# Altium PCB ART_CARD Rev 5.PcbDoc (part 12 of 13)
Units mil, origin at the board's own origin, x right, y up, seen from the top; angles counter-clockwise.
Board outline 6600.39 x 3903.54 mil, 8 copper layers (Top, Inner Layer 2, Inner Layer 3, Inner Layer 4, Inner Layer 5, Inner Layer 6, Inner Layer 7, Bottom), stack 63.111 mil thick; 542 components, 382 nets, 2410 pads, 1433 vias.
Unrouted connection lines stored in the file: 1247.
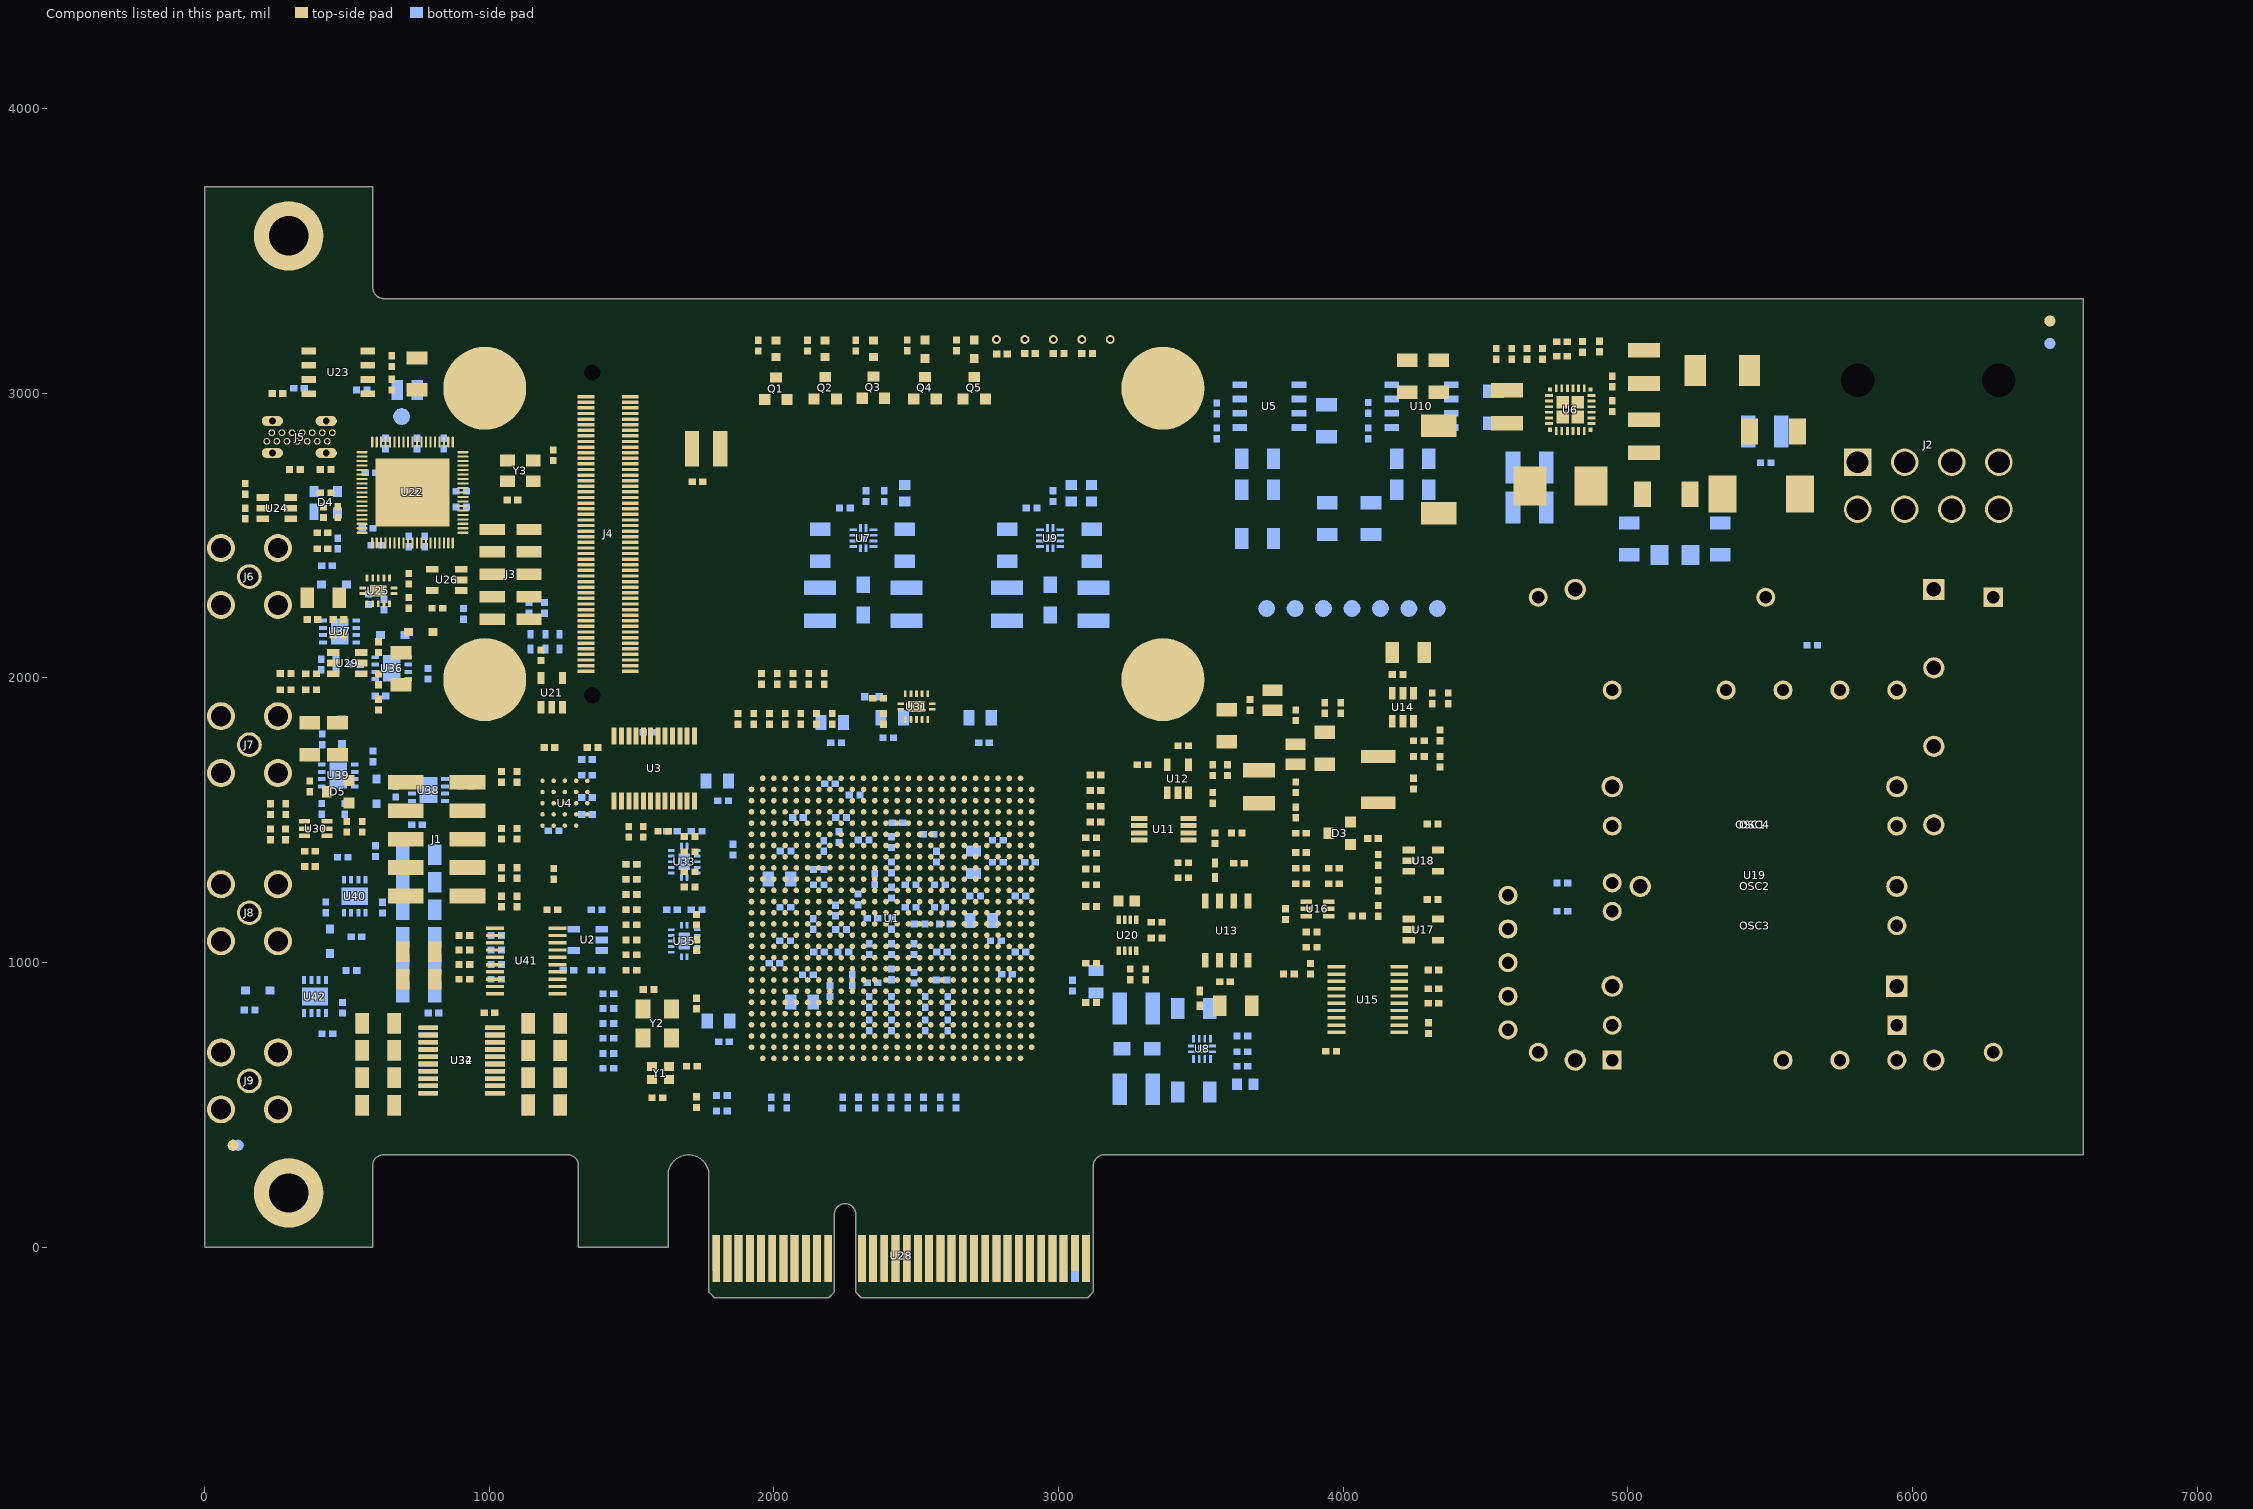
[diagram p18: the components of this part, seen from the top]

## Other copper (continued)
Inner Layer 2 (plane layer: these items are gaps in the copper):
  circle w12.2: c-275.59,-275.59 r98.43
  circle w12.2: c-275.59,-275.59 r98.43
  circle w12.2: c-275.59,-275.59 r98.43
  circle w12.2: c-275.59,-275.59 r98.43
  circle w12.2: c-275.59,-275.59 r98.43
  circle w12.2: c-275.59,-275.59 r98.43
  circle w12.2: c-275.59,-275.59 r98.43
  circle w12.2: c-275.59,-275.59 r98.43
  circle w12.2: c-275.59,-275.59 r98.43
  circle w12.2: c-275.59,-275.59 r98.43
  circle w12.2: c6889.76,3622.05 r98.43
  circle w12.2: c6889.76,3622.05 r98.43
  circle w12.2: c6889.76,3622.05 r98.43
  circle w12.2: c6889.76,3622.05 r98.43
  circle w12.2: c6889.76,3622.05 r98.43
  circle w12.2: c6889.76,3622.05 r98.43
  circle w12.2: c6889.76,3622.05 r98.43
  circle w12.2: c6889.76,3622.05 r98.43
  circle w12.2: c6889.76,3622.05 r98.43
  circle w12.2: c6889.76,3622.05 r98.43
  circle w12.2: c-275.59,4015.75 r98.43
  circle w12.2: c-275.59,4015.75 r98.43
  circle w12.2: c-275.59,4015.75 r98.43
  circle w12.2: c-275.59,4015.75 r98.43
  circle w12.2: c-275.59,4015.75 r98.43
  circle w12.2: c-275.59,4015.75 r98.43
  circle w12.2: c-275.59,4015.75 r98.43
  circle w12.2: c-275.59,4015.75 r98.43
  circle w12.2: c-275.59,4015.75 r98.43
  circle w12.2: c-275.59,4015.75 r98.43
  region: 89 vertices and 1 holes, not listed, extent 0,-177.17 6600.39,3726.38
  lines w5.91: 1781.59,254.06 cw(c1771.65,253.94) 1781.59,253.94 1781.59,-153.36 1795.45,-167.23 2188.8,-167.23 2202.66,-153.36 2202.66,116.14 cw(c2250,116.14) 2297.34,116.14 2297.34,-153.36 2311.2,-167.23 3098.25,-167.23 3112.11,-153.36 3112.11,285.43 cw(c3161.42,285.43) 3161.42,334.74 6590.46,334.74 6590.46,3322.74 629.92,3322.74 cw(c629.92,3372.05) 580.61,3372.05 580.61,3716.44 9.94,3716.44 9.94,9.94 580.61,9.94 580.61,287.4 cw(c627.95,287.4) 627.95,334.74 1275.59,334.74 cw(c1275.59,287.4) 1322.93,287.4 1322.93,9.94 1618.02,9.94 1618.02,253.94 cw(c1627.95,253.94) 1618.02,254.07 cw(c1699.8,252.95) 1781.59,254.09
  lines w10: 4173.23,-590.55 6082.68,-590.55 ; 5551.18,-708.66 5551.18,-472.44 ; 4173.23,-708.66 6082.68,-708.66 6082.68,-472.44 4173.23,-472.44 4173.23,-708.66
  lines w12.2: -370.08,-267.72 -370.08,-263.78 ; -370.08,4023.62 -370.08,4027.56 ; -366.14,-248.03 -279.53,-248.03 ; -366.14,4043.31 -279.53,4043.31 ; -358.27,-232.28 -275.59,-232.28 ; -358.27,4059.06 -275.59,4059.06 ; -354.33,-220.47 -275.59,-220.47 ; -354.33,4070.87 -275.59,4070.87 ; -346.46,-212.6 -279.53,-212.6 -350.39,-212.6 -275.59,-212.6 ; -346.46,4078.74 -279.53,4078.74 -350.39,4078.74 -275.59,4078.74 ; -338.58,-200.79 -279.53,-200.79 -334.65,-200.79 ; -338.58,4090.55 -279.53,4090.55 -334.65,4090.55 ; -334.65,-196.85 -275.59,-196.85 ; -334.65,4094.49 -275.59,4094.49 ; -326.77,-196.85 -275.59,-196.85 ; -326.77,4094.49 -275.59,4094.49 ; -322.83,-196.85 -330.71,-196.85 -275.59,-196.85 ; -322.83,4094.49 -330.71,4094.49 -275.59,4094.49 ; -311.02,-185.04 -275.59,-185.04 -299.21,-185.04 -279.53,-185.04 ; -311.02,4106.3 -275.59,4106.3 -299.21,4106.3 -279.53,4106.3 ; -307.09,-185.04 -279.53,-185.04 ; -307.09,4106.3 -279.53,4106.3 ; -303.15,-185.04 -279.53,-185.04 ; -303.15,4106.3 -279.53,4106.3 ; -279.53,-255.91 -370.08,-255.91 ; -279.53,-244.09 -366.14,-244.09 -275.59,-244.09 ; -279.53,-236.22 -362.2,-236.22 -275.59,-236.22 ; -279.53,-224.41 -354.33,-224.41 -275.59,-224.41 ; -279.53,4035.43 -370.08,4035.43 ; -279.53,4047.24 -366.14,4047.24 -275.59,4047.24 ; -279.53,4055.12 -362.2,4055.12 -275.59,4055.12 ; -279.53,4066.93 -354.33,4066.93 -275.59,4066.93 ; -275.59,-338.58 -200.79,-338.58 ; -275.59,-326.77 -196.85,-326.77 ; -275.59,-318.9 -188.98,-318.9 ; -275.59,-307.09 -185.04,-307.09 ; -275.59,3952.76 -200.79,3952.76 ; -275.59,3964.57 -196.85,3964.57 ; -275.59,3972.44 -188.98,3972.44 ; -275.59,3984.25 -185.04,3984.25 ; -271.65,-358.27 -224.41,-358.27 ; -271.65,-346.46 -208.66,-346.46 ; -271.65,-342.52 -208.66,-342.52 ; -271.65,-334.65 -200.79,-334.65 ; -271.65,-287.4 -181.1,-287.4 ; -271.65,-283.46 -181.1,-283.46 ; -271.65,3933.07 -224.41,3933.07 ; -271.65,3944.88 -208.66,3944.88 ; -271.65,3948.82 -208.66,3948.82 ; -271.65,3956.69 -200.79,3956.69 ; -271.65,4003.94 -181.1,4003.94 ; -271.65,4007.87 -181.1,4007.87 ; -248.03,-366.14 -271.65,-366.14 ; -248.03,3925.2 -271.65,3925.2 ; -244.09,-366.14 -275.59,-366.14 ; -244.09,3925.2 -275.59,3925.2 ; -240.16,-362.2 -275.59,-362.2 ; -240.16,3929.13 -275.59,3929.13 ; -236.22,-362.2 -275.59,-362.2 ; -236.22,3929.13 -275.59,3929.13 ; -224.41,-354.33 -275.59,-354.33 -220.47,-354.33 -271.65,-354.33 -216.54,-354.33 ; -224.41,3937.01 -275.59,3937.01 -220.47,3937.01 -271.65,3937.01 -216.54,3937.01 ; -216.54,-350.39 -275.59,-350.39 -212.6,-350.39 ; -216.54,3940.94 -275.59,3940.94 -212.6,3940.94 ; -212.6,-346.46 -275.59,-346.46 ; -212.6,3944.88 -275.59,3944.88 ; -204.72,-342.52 -275.59,-342.52 ; -204.72,3948.82 -275.59,3948.82 ; -200.79,-330.71 -271.65,-330.71 -196.85,-330.71 ; -200.79,3960.63 -271.65,3960.63 -196.85,3960.63 ; -188.98,-307.09 -271.65,-307.09 ; -188.98,3984.25 -271.65,3984.25 ; -185.04,-287.4 -275.59,-287.4 ; -185.04,-283.46 -275.59,-283.46 ; -185.04,4003.94 -275.59,4003.94 ; -185.04,4007.87 -275.59,4007.87 ; 6795.28,3629.92 6795.28,3633.86 ; 6799.21,3649.61 6885.83,3649.61 ; 6807.09,3665.35 6889.76,3665.35 ; 6811.02,3677.17 6889.76,3677.17 ; 6818.9,3685.04 6885.83,3685.04 6814.96,3685.04 6889.76,3685.04 ; 6826.77,3696.85 6885.83,3696.85 6830.71,3696.85 ; 6830.71,3700.79 6889.76,3700.79 ; 6838.58,3700.79 6889.76,3700.79 ; 6842.52,3700.79 6834.65,3700.79 6889.76,3700.79 ; 6854.33,3712.6 6889.76,3712.6 6866.14,3712.6 6885.83,3712.6 ; 6858.27,3712.6 6885.83,3712.6 ; 6862.2,3712.6 6885.83,3712.6 ; 6885.83,3641.73 6795.28,3641.73 ; 6885.83,3653.54 6799.21,3653.54 6889.76,3653.54 ; 6885.83,3661.42 6803.15,3661.42 6889.76,3661.42 ; 6885.83,3673.23 6811.02,3673.23 6889.76,3673.23 ; 6889.76,3559.06 6964.57,3559.06 ; 6889.76,3570.87 6968.5,3570.87 ; 6889.76,3578.74 6976.38,3578.74 ; 6889.76,3590.55 6980.32,3590.55 ; 6893.7,3539.37 6940.94,3539.37 ; 6893.7,3551.18 6956.69,3551.18 ; 6893.7,3555.12 6956.69,3555.12 ; 6893.7,3562.99 6964.57,3562.99 ; 6893.7,3610.24 6984.25,3610.24 ; 6893.7,3614.17 6984.25,3614.17 ; 6917.32,3531.5 6893.7,3531.5 ; 6921.26,3531.5 6889.76,3531.5 ; 6925.2,3535.43 6889.76,3535.43 ; 6929.13,3535.43 6889.76,3535.43 ; 6940.94,3543.31 6889.76,3543.31 6944.88,3543.31 6893.7,3543.31 6948.82,3543.31 ; 6948.82,3547.24 6889.76,3547.24 6952.76,3547.24 ; 6952.76,3551.18 6889.76,3551.18 ; 6960.63,3555.12 6889.76,3555.12 ; 6964.57,3566.93 6893.7,3566.93 6968.5,3566.93 ; 6976.38,3590.55 6893.7,3590.55 ; 6980.32,3610.24 6889.76,3610.24 ; 6980.32,3614.17 6889.76,3614.17 ; -425.2,-275.59 -125.98,-275.59 ; -425.2,-275.59 -125.98,-275.59 ; -425.2,-275.59 -125.98,-275.59 ; -425.2,-275.59 -125.98,-275.59 ; -425.2,-275.59 -125.98,-275.59 ; -425.2,-275.59 -125.98,-275.59 ; -425.2,-275.59 -125.98,-275.59 ; -425.2,-275.59 -125.98,-275.59 ; -425.2,-275.59 -125.98,-275.59 ; -425.2,-275.59 -125.98,-275.59 ; -425.2,4015.75 -125.98,4015.75 ; -425.2,4015.75 -125.98,4015.75 ; -425.2,4015.75 -125.98,4015.75 ; -425.2,4015.75 -125.98,4015.75 ; -425.2,4015.75 -125.98,4015.75 ; -425.2,4015.75 -125.98,4015.75 ; -425.2,4015.75 -125.98,4015.75 ; -425.2,4015.75 -125.98,4015.75 ; -425.2,4015.75 -125.98,4015.75 ; -425.2,4015.75 -125.98,4015.75 ; -370.08,-263.78 -275.59,-263.78 ; -370.08,-263.78 -279.53,-263.78 -370.08,-263.78 ; -370.08,-263.78 -275.59,-263.78 ; -370.08,-263.78 -275.59,-263.78 ; -370.08,-263.78 -275.59,-263.78 ; -370.08,-263.78 -275.59,-263.78 ; -370.08,-263.78 -275.59,-263.78 ; -370.08,-263.78 -275.59,-263.78 ; -370.08,-263.78 -275.59,-263.78 ; -370.08,-255.91 -275.59,-255.91 -370.08,-255.91 ; -370.08,-251.97 -279.53,-251.97 ; -370.08,-251.97 -279.53,-251.97 ; -370.08,-251.97 -279.53,-251.97 ; -370.08,-251.97 -275.59,-251.97 -370.08,-251.97 ; -370.08,4027.56 -275.59,4027.56 ; -370.08,4027.56 -279.53,4027.56 -370.08,4027.56 ; -370.08,4027.56 -275.59,4027.56 ; -370.08,4027.56 -275.59,4027.56 ; -370.08,4027.56 -275.59,4027.56 ; -370.08,4027.56 -275.59,4027.56 ; -370.08,4027.56 -275.59,4027.56 ; -370.08,4027.56 -275.59,4027.56 ; -370.08,4027.56 -275.59,4027.56 ; -370.08,4035.43 -275.59,4035.43 -370.08,4035.43 ; -370.08,4039.37 -279.53,4039.37 ; -370.08,4039.37 -279.53,4039.37 ; -370.08,4039.37 -279.53,4039.37 ; -370.08,4039.37 -275.59,4039.37 -370.08,4039.37 ; -366.14,-240.16 -279.53,-240.16 ; -366.14,-240.16 -279.53,-240.16 ; -366.14,-240.16 -275.59,-240.16 ; -366.14,-240.16 -275.59,-240.16 ; -366.14,4051.18 -279.53,4051.18 ; -366.14,4051.18 -279.53,4051.18 ; -366.14,4051.18 -275.59,4051.18 ; -366.14,4051.18 -275.59,4051.18 ; -362.2,-240.16 -279.53,-240.16 ; -362.2,-240.16 -279.53,-240.16 ; -362.2,-240.16 -275.59,-240.16 ; -362.2,4051.18 -279.53,4051.18 ; -362.2,4051.18 -279.53,4051.18 ; -362.2,4051.18 -275.59,4051.18 ; -358.27,-228.35 -279.53,-228.35 ; -358.27,-228.35 -279.53,-228.35 ; -358.27,-228.35 -279.53,-228.35 ; -358.27,-228.35 -279.53,-228.35 ; -358.27,-228.35 -275.59,-228.35 -358.27,-228.35 ; -358.27,-228.35 -279.53,-228.35 ; -358.27,4062.99 -279.53,4062.99 ; -358.27,4062.99 -279.53,4062.99 ; -358.27,4062.99 -279.53,4062.99 ; -358.27,4062.99 -279.53,4062.99 ; -358.27,4062.99 -275.59,4062.99 -358.27,4062.99 ; -358.27,4062.99 -279.53,4062.99 ; -350.39,-216.54 -279.53,-216.54 ; -350.39,-216.54 -279.53,-216.54 ; -350.39,-216.54 -279.53,-216.54 ; -350.39,-216.54 -275.59,-216.54 -354.33,-216.54 -279.53,-216.54 ; -350.39,-216.54 -279.53,-216.54 ; -350.39,4074.8 -279.53,4074.8 ; -350.39,4074.8 -279.53,4074.8 ; -350.39,4074.8 -279.53,4074.8 ; -350.39,4074.8 -275.59,4074.8 -354.33,4074.8 -279.53,4074.8 ; -350.39,4074.8 -279.53,4074.8 ; -342.52,-204.72 -279.53,-204.72 ; -342.52,-204.72 -279.53,-204.72 ; -342.52,-204.72 -279.53,-204.72 ; -342.52,-204.72 -275.59,-204.72 ; -342.52,-204.72 -279.53,-204.72 ; -342.52,-204.72 -275.59,-204.72 ; -342.52,4086.61 -279.53,4086.61 ; -342.52,4086.61 -279.53,4086.61 ; -342.52,4086.61 -279.53,4086.61 ; -342.52,4086.61 -275.59,4086.61 ; -342.52,4086.61 -279.53,4086.61 ; -342.52,4086.61 -275.59,4086.61 ; -322.83,-192.91 -279.53,-192.91 ; -322.83,-192.91 -279.53,-192.91 ; -322.83,-192.91 -279.53,-192.91 ; -322.83,4098.43 -279.53,4098.43 ; -322.83,4098.43 -279.53,4098.43 ; -322.83,4098.43 -279.53,4098.43 ; -318.9,-188.98 -279.53,-188.98 ; -318.9,-188.98 -279.53,-188.98 ; -318.9,-188.98 -275.59,-188.98 -311.02,-188.98 -279.53,-188.98 ; -318.9,4102.36 -279.53,4102.36 ; -318.9,4102.36 -279.53,4102.36 ; -318.9,4102.36 -275.59,4102.36 -311.02,4102.36 -279.53,4102.36 ; -279.53,-251.97 -366.14,-251.97 -279.53,-251.97 ; -279.53,-204.72 -338.58,-204.72 -275.59,-204.72 ; -279.53,-192.91 -326.77,-192.91 -279.53,-192.91 ; -279.53,4039.37 -366.14,4039.37 -279.53,4039.37 ; -279.53,4086.61 -338.58,4086.61 -275.59,4086.61 ; -279.53,4098.43 -326.77,4098.43 -279.53,4098.43 ; -275.59,-425.2 -275.59,-125.98 ; -275.59,-425.2 -275.59,-125.98 ; -275.59,-425.2 -275.59,-125.98 ; -275.59,-425.2 -275.59,-125.98 ; -275.59,-425.2 -275.59,-125.98 ; -275.59,-425.2 -275.59,-125.98 ; -275.59,-425.2 -275.59,-125.98 ; -275.59,-425.2 -275.59,-125.98 ; -275.59,-425.2 -275.59,-125.98 ; -275.59,-425.2 -275.59,-125.98 ; -275.59,-366.14 -240.16,-366.14 -271.65,-366.14 ; -275.59,-366.14 -251.97,-366.14 -271.65,-366.14 ; -275.59,-362.2 -232.28,-362.2 -275.59,-362.2 ; -275.59,-358.27 -224.41,-358.27 ; -275.59,-358.27 -224.41,-358.27 ; -275.59,-358.27 -224.41,-358.27 ; -275.59,-346.46 -208.66,-346.46 ; -275.59,-346.46 -208.66,-346.46 ; -275.59,-346.46 -208.66,-346.46 ; -275.59,-342.52 -208.66,-342.52 ; -275.59,-342.52 -208.66,-342.52 ; -275.59,-334.65 -200.79,-334.65 ; -275.59,-334.65 -200.79,-334.65 ; -275.59,-334.65 -200.79,-334.65 ; -275.59,-334.65 -200.79,-334.65 ; -275.59,-330.71 -196.85,-330.71 ; -275.59,-330.71 -196.85,-330.71 ; -275.59,-330.71 -196.85,-330.71 ; -275.59,-322.83 -192.91,-322.83 ; -275.59,-322.83 -192.91,-322.83 ; -275.59,-322.83 -192.91,-322.83 ; -275.59,-311.02 -185.04,-311.02 ; -275.59,-311.02 -188.98,-311.02 -271.65,-311.02 -185.04,-311.02 ; -275.59,-311.02 -185.04,-311.02 ; -275.59,-287.4 -181.1,-287.4 ; -275.59,-287.4 -181.1,-287.4 ; -275.59,-287.4 -181.1,-287.4 ; -275.59,-283.46 -181.1,-283.46 ; -275.59,-283.46 -181.1,-283.46 ; -275.59,-283.46 -181.1,-283.46 ; -275.59,3866.14 -275.59,4165.35 ; -275.59,3866.14 -275.59,4165.35 ; -275.59,3866.14 -275.59,4165.35 ; -275.59,3866.14 -275.59,4165.35 ; -275.59,3866.14 -275.59,4165.35 ; -275.59,3866.14 -275.59,4165.35 ; -275.59,3866.14 -275.59,4165.35 ; -275.59,3866.14 -275.59,4165.35 ; -275.59,3866.14 -275.59,4165.35 ; -275.59,3866.14 -275.59,4165.35 ; -275.59,3925.2 -240.16,3925.2 -271.65,3925.2 ; -275.59,3925.2 -251.97,3925.2 -271.65,3925.2 ; -275.59,3929.13 -232.28,3929.13 -275.59,3929.13 ; -275.59,3933.07 -224.41,3933.07 ; -275.59,3933.07 -224.41,3933.07 ; -275.59,3933.07 -224.41,3933.07 ; -275.59,3944.88 -208.66,3944.88 ; -275.59,3944.88 -208.66,3944.88 ; -275.59,3944.88 -208.66,3944.88 ; -275.59,3948.82 -208.66,3948.82 ; -275.59,3948.82 -208.66,3948.82 ; -275.59,3956.69 -200.79,3956.69 ; -275.59,3956.69 -200.79,3956.69 ; -275.59,3956.69 -200.79,3956.69 ; -275.59,3956.69 -200.79,3956.69 ; -275.59,3960.63 -196.85,3960.63 ; -275.59,3960.63 -196.85,3960.63 ; -275.59,3960.63 -196.85,3960.63 ; -275.59,3968.5 -192.91,3968.5 ; -275.59,3968.5 -192.91,3968.5 ; -275.59,3968.5 -192.91,3968.5 ; -275.59,3980.31 -185.04,3980.31 ; -275.59,3980.31 -188.98,3980.31 -271.65,3980.31 -185.04,3980.31 ; -275.59,3980.31 -185.04,3980.31 ; -275.59,4003.94 -181.1,4003.94 ; -275.59,4003.94 -181.1,4003.94 ; -275.59,4003.94 -181.1,4003.94 ; -275.59,4007.87 -181.1,4007.87 ; -275.59,4007.87 -181.1,4007.87 ; -275.59,4007.87 -181.1,4007.87 ; -271.65,-318.9 -188.98,-318.9 ; -271.65,-318.9 -188.98,-318.9 ; -271.65,-318.9 -188.98,-318.9 ; -271.65,-318.9 -188.98,-318.9 ; -271.65,-307.09 -185.04,-307.09 ; -271.65,-307.09 -185.04,-307.09 ; -271.65,-307.09 -185.04,-307.09 ; -271.65,-299.21 -181.1,-299.21 ; -271.65,-299.21 -181.1,-299.21 ; -271.65,-299.21 -181.1,-299.21 ; -271.65,-295.28 -181.1,-295.28 ; -271.65,-295.28 -181.1,-295.28 ; -271.65,-295.28 -181.1,-295.28 ; -271.65,3972.44 -188.98,3972.44 ; -271.65,3972.44 -188.98,3972.44 ; -271.65,3972.44 -188.98,3972.44 ; -271.65,3972.44 -188.98,3972.44 ; -271.65,3984.25 -185.04,3984.25 ; -271.65,3984.25 -185.04,3984.25 ; -271.65,3984.25 -185.04,3984.25 ; -271.65,3992.13 -181.1,3992.13 ; -271.65,3992.13 -181.1,3992.13 ; -271.65,3992.13 -181.1,3992.13 ; -271.65,3996.06 -181.1,3996.06 ; -271.65,3996.06 -181.1,3996.06 ; -271.65,3996.06 -181.1,3996.06 ; -200.79,-334.65 -196.85,-330.71 ; -200.79,3956.69 -196.85,3960.63 ; -192.91,-322.83 -271.65,-322.83 -192.91,-322.83 ; -192.91,3968.5 -271.65,3968.5 -192.91,3968.5 ; -181.1,-299.21 -275.59,-299.21 -181.1,-299.21 ; -181.1,-295.28 -275.59,-295.28 -181.1,-295.28 ; -181.1,3992.13 -275.59,3992.13 -181.1,3992.13 ; -181.1,3996.06 -275.59,3996.06 -181.1,3996.06 ; 6740.16,3622.05 7039.37,3622.05 ; 6740.16,3622.05 7039.37,3622.05 ; 6740.16,3622.05 7039.37,3622.05 ; 6740.16,3622.05 7039.37,3622.05 ; 6740.16,3622.05 7039.37,3622.05 ; 6740.16,3622.05 7039.37,3622.05 ; 6740.16,3622.05 7039.37,3622.05 ; 6740.16,3622.05 7039.37,3622.05 ; 6740.16,3622.05 7039.37,3622.05 ; 6740.16,3622.05 7039.37,3622.05 ; 6795.28,3633.86 6889.76,3633.86 ; 6795.28,3633.86 6885.83,3633.86 6795.28,3633.86 ; 6795.28,3633.86 6889.76,3633.86 ; 6795.28,3633.86 6889.76,3633.86 ; 6795.28,3633.86 6889.76,3633.86 ; 6795.28,3633.86 6889.76,3633.86 ; 6795.28,3633.86 6889.76,3633.86 ; 6795.28,3633.86 6889.76,3633.86 ; 6795.28,3633.86 6889.76,3633.86 ; 6795.28,3641.73 6889.76,3641.73 6795.28,3641.73 ; 6795.28,3645.67 6885.83,3645.67 ; 6795.28,3645.67 6885.83,3645.67 ; 6795.28,3645.67 6885.83,3645.67 ; 6795.28,3645.67 6889.76,3645.67 6795.28,3645.67 ; 6799.21,3657.48 6885.83,3657.48 ; 6799.21,3657.48 6885.83,3657.48 ; 6799.21,3657.48 6889.76,3657.48 ; 6799.21,3657.48 6889.76,3657.48 ; 6803.15,3657.48 6885.83,3657.48 ; 6803.15,3657.48 6885.83,3657.48 ; 6803.15,3657.48 6889.76,3657.48 ; 6807.09,3669.29 6885.83,3669.29 ; 6807.09,3669.29 6885.83,3669.29 ; 6807.09,3669.29 6885.83,3669.29 ; 6807.09,3669.29 6885.83,3669.29 ; 6807.09,3669.29 6889.76,3669.29 6807.09,3669.29 ; 6807.09,3669.29 6885.83,3669.29 ; 6814.96,3681.1 6885.83,3681.1 ; 6814.96,3681.1 6885.83,3681.1 ; 6814.96,3681.1 6885.83,3681.1 ; 6814.96,3681.1 6889.76,3681.1 6811.02,3681.1 6885.83,3681.1 ; 6814.96,3681.1 6885.83,3681.1 ; 6822.83,3692.91 6885.83,3692.91 ; 6822.83,3692.91 6885.83,3692.91 ; 6822.83,3692.91 6885.83,3692.91 ; 6822.83,3692.91 6889.76,3692.91 ; 6822.83,3692.91 6885.83,3692.91 ; 6822.83,3692.91 6889.76,3692.91 ; 6842.52,3704.72 6885.83,3704.72 ; 6842.52,3704.72 6885.83,3704.72 ; 6842.52,3704.72 6885.83,3704.72 ; 6846.46,3708.66 6885.83,3708.66 ; 6846.46,3708.66 6885.83,3708.66 ; 6846.46,3708.66 6889.76,3708.66 6854.33,3708.66 6885.83,3708.66 ; 6885.83,3645.67 6799.21,3645.67 6885.83,3645.67 ; 6885.83,3692.91 6826.77,3692.91 6889.76,3692.91 ; 6885.83,3704.72 6838.58,3704.72 6885.83,3704.72 ; 6889.76,3472.44 6889.76,3771.65 ; 6889.76,3472.44 6889.76,3771.65 ; 6889.76,3472.44 6889.76,3771.65 ; 6889.76,3472.44 6889.76,3771.65 ; 6889.76,3472.44 6889.76,3771.65 ; 6889.76,3472.44 6889.76,3771.65 ; 6889.76,3472.44 6889.76,3771.65 ; 6889.76,3472.44 6889.76,3771.65 ; 6889.76,3472.44 6889.76,3771.65 ; 6889.76,3472.44 6889.76,3771.65 ; 6889.76,3531.5 6925.2,3531.5 6893.7,3531.5 ; 6889.76,3531.5 6913.39,3531.5 6893.7,3531.5 ; 6889.76,3535.43 6933.07,3535.43 6889.76,3535.43 ; 6889.76,3539.37 6940.94,3539.37 ; 6889.76,3539.37 6940.94,3539.37 ; 6889.76,3539.37 6940.94,3539.37 ; 6889.76,3551.18 6956.69,3551.18 ; 6889.76,3551.18 6956.69,3551.18 ; 6889.76,3551.18 6956.69,3551.18 ; 6889.76,3555.12 6956.69,3555.12 ; 6889.76,3555.12 6956.69,3555.12 ; 6889.76,3562.99 6964.57,3562.99 ; 6889.76,3562.99 6964.57,3562.99 ; 6889.76,3562.99 6964.57,3562.99 ; 6889.76,3562.99 6964.57,3562.99 ; 6889.76,3566.93 6968.5,3566.93 ; 6889.76,3566.93 6968.5,3566.93 ; 6889.76,3566.93 6968.5,3566.93 ; 6889.76,3574.8 6972.44,3574.8 ; 6889.76,3574.8 6972.44,3574.8 ; 6889.76,3574.8 6972.44,3574.8 ; 6889.76,3586.61 6980.32,3586.61 ; 6889.76,3586.61 6976.38,3586.61 6893.7,3586.61 6980.32,3586.61 ; 6889.76,3586.61 6980.32,3586.61 ; 6889.76,3610.24 6984.25,3610.24 ; 6889.76,3610.24 6984.25,3610.24 ; 6889.76,3610.24 6984.25,3610.24 ; 6889.76,3614.17 6984.25,3614.17 ; 6889.76,3614.17 6984.25,3614.17 ; 6889.76,3614.17 6984.25,3614.17 ; 6893.7,3578.74 6976.38,3578.74 ; 6893.7,3578.74 6976.38,3578.74 ; 6893.7,3578.74 6976.38,3578.74 ; 6893.7,3578.74 6976.38,3578.74 ; 6893.7,3590.55 6980.32,3590.55 ; 6893.7,3590.55 6980.32,3590.55 ; 6893.7,3590.55 6980.32,3590.55 ; 6893.7,3598.43 6984.25,3598.43 ; 6893.7,3598.43 6984.25,3598.43 ; 6893.7,3598.43 6984.25,3598.43 ; 6893.7,3602.36 6984.25,3602.36 ; 6893.7,3602.36 6984.25,3602.36 ; 6893.7,3602.36 6984.25,3602.36 ; 6964.57,3562.99 6968.5,3566.93 ; 6972.44,3574.8 6893.7,3574.8 6972.44,3574.8 ; 6984.25,3598.43 6889.76,3598.43 6984.25,3598.43 ; 6984.25,3602.36 6889.76,3602.36 6984.25,3602.36
  text "2" at 390.42,369.02 h39.37
  text "FILM:" at 4200.79,-559.06 h50
  text "COUCHE INTERNE 1" at 4468.5,-559.06 h50
  text "ARTEMIS" at 5633.86,-562.99 h50
  text "03/03/22" at 5641.73,-673.23 h39.37
  text "DOSSIER:" at 4200.79,-681.1 h50
  text "ART_CARD Rev 5" at 4622.05,-681.1 h50

## Silkscreen, mask and mechanical layers (free items; w line width, h text height)
Silkscreen Top:
  circle w12.2: c-275.59,-275.59 r98.43
  circle w12.2: c6889.76,3622.05 r98.43
  circle w12.2: c-275.59,4015.75 r98.43
  lines w10: 4173.23,-590.55 6082.68,-590.55 ; 5551.18,-708.66 5551.18,-472.44 ; 4173.23,-708.66 4173.23,-472.44 6082.68,-472.44 6082.68,-708.66 4173.23,-708.66
  lines w12.2: -425.2,-275.59 -125.98,-275.59 ; -425.2,4015.75 -125.98,4015.75 ; -370.08,-263.78 -275.59,-263.78 ; -370.08,-251.97 -279.53,-251.97 ; -370.08,4027.56 -275.59,4027.56 ; -370.08,4039.37 -279.53,4039.37 ; -362.2,-240.16 -279.53,-240.16 ; -362.2,4051.18 -279.53,4051.18 ; -358.27,-228.35 -279.53,-228.35 ; -358.27,4062.99 -279.53,4062.99 ; -350.39,-216.54 -279.53,-216.54 ; -350.39,4074.8 -279.53,4074.8 ; -342.52,-204.72 -279.53,-204.72 ; -342.52,4086.61 -279.53,4086.61 ; -326.77,-192.91 -279.53,-192.91 ; -326.77,4098.43 -279.53,4098.43 ; -307.09,-185.04 -279.53,-185.04 ; -307.09,4106.3 -279.53,4106.3 ; -275.59,-425.2 -275.59,-125.98 ; -275.59,-283.46 -181.1,-283.46 ; -275.59,3866.14 -275.59,4165.35 ; -275.59,4007.87 -181.1,4007.87 ; -271.65,-366.14 -240.16,-366.14 ; -271.65,-354.33 -220.47,-354.33 ; -271.65,-342.52 -208.66,-342.52 ; -271.65,-330.71 -196.85,-330.71 ; -271.65,-318.9 -188.98,-318.9 ; -271.65,-307.09 -185.04,-307.09 ; -271.65,-295.28 -181.1,-295.28 ; -271.65,3925.2 -240.16,3925.2 ; -271.65,3937.01 -220.47,3937.01 ; -271.65,3948.82 -208.66,3948.82 ; -271.65,3960.63 -196.85,3960.63 ; -271.65,3972.44 -188.98,3972.44 ; -271.65,3984.25 -185.04,3984.25 ; -271.65,3996.06 -181.1,3996.06 ; 6740.16,3622.05 7039.37,3622.05 ; 6795.28,3633.86 6889.76,3633.86 ; 6795.28,3645.67 6885.83,3645.67 ; 6803.15,3657.48 6885.83,3657.48 ; 6807.09,3669.29 6885.83,3669.29 ; 6814.96,3681.1 6885.83,3681.1 ; 6822.83,3692.91 6885.83,3692.91 ; 6838.58,3704.72 6885.83,3704.72 ; 6858.27,3712.6 6885.83,3712.6 ; 6889.76,3472.44 6889.76,3771.65 ; 6889.76,3614.17 6984.25,3614.17 ; 6893.7,3531.5 6925.2,3531.5 ; 6893.7,3543.31 6944.88,3543.31 ; 6893.7,3555.12 6956.69,3555.12 ; 6893.7,3566.93 6968.5,3566.93 ; 6893.7,3578.74 6976.38,3578.74 ; 6893.7,3590.55 6980.32,3590.55 ; 6893.7,3602.36 6984.25,3602.36
  text "ART_CARD Rev 5" at 592.52,359.25 h49.21
  text "FILM:" at 4200.79,-559.06 h50
  text "SERIGRAPHIE COMPOSANT" at 4468.5,-559.06 h50
  text "ARTEMIS" at 5633.86,-562.99 h50
  text "03/03/22" at 5641.73,-673.23 h39.37
  text "DOSSIER:" at 4200.79,-681.1 h50
  text "ART_CARD Rev 5" at 4622.05,-681.1 h50
Silkscreen Bottom:
  drawing of 1247 lines, arcs and shapes, not listed
  text "LABEL" at 2204.72,2952.76 h50
  text "11V" at 4291.34,2086.61 h49.21 r270
  text "GND" at 3700.79,2047.24 h49.21 r270
  text "1.8V" at 3996.06,2047.24 h49.21 r270
  text "5.0V" at 3799.21,2027.56 h49.21 r270
  text "3.3V" at 3897.64,2027.56 h49.21 r270
  text "0.9V" at 4192.91,2027.56 h49.21 r270
  text "0.95V" at 4094.49,1968.5 h49.21 r270
  text "ARTEMIS" at 4586.61,-562.99 h50
  text "SERIGRAPHIE SOUDURE" at 5807.09,-562.99 h50
  text "FILM:" at 6043.31,-562.99 h50
  text "03/03/22" at 4566.93,-673.23 h39.37
  text "ART_CARD Rev 5" at 5629.92,-681.1 h50
  text "DOSSIER:" at 6043.31,-681.1 h50
Paste Mask Top:
  circle w12.2: c-275.59,-275.59 r98.43
  circle w12.2: c6889.76,3622.05 r98.43
  circle w12.2: c-275.59,4015.75 r98.43
  lines w10: 4173.23,-590.55 6082.68,-590.55 ; 5551.18,-708.66 5551.18,-472.44 ; 4173.23,-708.66 4173.23,-472.44 6082.68,-472.44 6082.68,-708.66 4173.23,-708.66
  lines w12.2: -425.2,-275.59 -125.98,-275.59 ; -425.2,4015.75 -125.98,4015.75 ; -370.08,-263.78 -279.53,-263.78 ; -370.08,4027.56 -279.53,4027.56 ; -366.14,-251.97 -279.53,-251.97 ; -366.14,-240.16 -279.53,-240.16 ; -366.14,4039.37 -279.53,4039.37 ; -366.14,4051.18 -279.53,4051.18 ; -358.27,-228.35 -279.53,-228.35 ; -358.27,4062.99 -279.53,4062.99 ; -354.33,-216.54 -275.59,-216.54 ; -354.33,4074.8 -275.59,4074.8 ; -338.58,-204.72 -275.59,-204.72 ; -338.58,4086.61 -275.59,4086.61 ; -322.83,-192.91 -279.53,-192.91 ; -322.83,4098.43 -279.53,4098.43 ; -299.21,-185.04 -279.53,-185.04 ; -299.21,4106.3 -279.53,4106.3 ; -275.59,-425.2 -275.59,-125.98 ; -275.59,-366.14 -240.16,-366.14 ; -275.59,-354.33 -220.47,-354.33 ; -275.59,-342.52 -208.66,-342.52 ; -275.59,-330.71 -196.85,-330.71 ; -275.59,-283.46 -185.04,-283.46 ; -275.59,3866.14 -275.59,4165.35 ; -275.59,3925.2 -240.16,3925.2 ; -275.59,3937.01 -220.47,3937.01 ; -275.59,3948.82 -208.66,3948.82 ; -275.59,3960.63 -196.85,3960.63 ; -275.59,4007.87 -185.04,4007.87 ; -271.65,-318.9 -188.98,-318.9 ; -271.65,-307.09 -185.04,-307.09 ; -271.65,-295.28 -181.1,-295.28 ; -271.65,3972.44 -188.98,3972.44 ; -271.65,3984.25 -185.04,3984.25 ; -271.65,3996.06 -181.1,3996.06 ; 6740.16,3622.05 7039.37,3622.05 ; 6795.28,3633.86 6885.83,3633.86 ; 6799.21,3645.67 6885.83,3645.67 ; 6799.21,3657.48 6885.83,3657.48 ; 6807.09,3669.29 6885.83,3669.29 ; 6811.02,3681.1 6889.76,3681.1 ; 6826.77,3692.91 6889.76,3692.91 ; 6842.52,3704.72 6885.83,3704.72 ; 6866.14,3712.6 6885.83,3712.6 ; 6889.76,3472.44 6889.76,3771.65 ; 6889.76,3531.5 6925.2,3531.5 ; 6889.76,3543.31 6944.88,3543.31 ; 6889.76,3555.12 6956.69,3555.12 ; 6889.76,3566.93 6968.5,3566.93 ; 6889.76,3614.17 6980.32,3614.17 ; 6893.7,3578.74 6976.38,3578.74 ; 6893.7,3590.55 6980.32,3590.55 ; 6893.7,3602.36 6984.25,3602.36
  text "FILM:" at 4200.79,-559.06 h50
  text "PATE A BRASER COMPOSANT" at 4429.13,-559.06 h45.28
  text "ARTEMIS" at 5633.86,-562.99 h50
  text "03/03/22" at 5641.73,-673.23 h39.37
  text "DOSSIER:" at 4200.79,-681.1 h50
  text "ART_CARD Rev 5" at 4622.05,-681.1 h50
Paste Mask Bottom:
  drawing of 648 lines, arcs and shapes, not listed
  text "ARTEMIS" at 4586.61,-562.99 h50
  text "PATE A BRASER SOUDURE" at 5826.77,-562.99 h50
  text "FILM:" at 6043.31,-562.99 h50
  text "03/03/22" at 4566.93,-673.23 h39.37
  text "ART_CARD Rev 5" at 5629.92,-681.1 h50
  text "DOSSIER:" at 6043.31,-681.1 h50
Solder Mask Top:
  circle w12.2: c-275.59,-275.59 r98.43
  circle w12.2: c6889.76,3622.05 r98.43
  circle w12.2: c-275.59,4015.75 r98.43
  lines w10: 4173.23,-590.55 6082.68,-590.55 ; 5551.18,-708.66 5551.18,-472.44 ; 4173.23,-708.66 4173.23,-472.44 6082.68,-472.44 6082.68,-708.66 4173.23,-708.66
  lines w12.2: -425.2,-275.59 -125.98,-275.59 ; -425.2,4015.75 -125.98,4015.75 ; -370.08,-263.78 -279.53,-263.78 ; -370.08,-255.91 -279.53,-255.91 ; -370.08,4027.56 -279.53,4027.56 ; -370.08,4035.43 -279.53,4035.43 ; -366.14,-244.09 -279.53,-244.09 ; -366.14,4047.24 -279.53,4047.24 ; -362.2,-236.22 -279.53,-236.22 ; -362.2,4055.12 -279.53,4055.12 ; -354.33,-224.41 -279.53,-224.41 ; -354.33,4066.93 -279.53,4066.93 ; -350.39,-212.6 -279.53,-212.6 ; -350.39,4078.74 -279.53,4078.74 ; -334.65,-200.79 -279.53,-200.79 ; -334.65,4090.55 -279.53,4090.55 ; -318.9,-188.98 -279.53,-188.98 ; -318.9,4102.36 -279.53,4102.36 ; -275.59,-425.2 -275.59,-125.98 ; -275.59,-358.27 -224.41,-358.27 ; -275.59,-346.46 -208.66,-346.46 ; -275.59,3866.14 -275.59,4165.35 ; -275.59,3933.07 -224.41,3933.07 ; -275.59,3944.88 -208.66,3944.88 ; -271.65,-366.14 -251.97,-366.14 ; -271.65,-334.65 -200.79,-334.65 ; -271.65,-322.83 -192.91,-322.83 ; -271.65,-311.02 -188.98,-311.02 ; -271.65,-299.21 -181.1,-299.21 ; -271.65,-287.4 -181.1,-287.4 ; -271.65,3925.2 -251.97,3925.2 ; -271.65,3956.69 -200.79,3956.69 ; -271.65,3968.5 -192.91,3968.5 ; -271.65,3980.31 -188.98,3980.31 ; -271.65,3992.13 -181.1,3992.13 ; -271.65,4003.94 -181.1,4003.94 ; 6740.16,3622.05 7039.37,3622.05 ; 6795.28,3633.86 6885.83,3633.86 ; 6795.28,3641.73 6885.83,3641.73 ; 6799.21,3653.54 6885.83,3653.54 ; 6803.15,3661.42 6885.83,3661.42 ; 6811.02,3673.23 6885.83,3673.23 ; 6814.96,3685.04 6885.83,3685.04 ; 6830.71,3696.85 6885.83,3696.85 ; 6846.46,3708.66 6885.83,3708.66 ; 6889.76,3472.44 6889.76,3771.65 ; 6889.76,3539.37 6940.94,3539.37 ; 6889.76,3551.18 6956.69,3551.18 ; 6893.7,3531.5 6913.39,3531.5 ; 6893.7,3562.99 6964.57,3562.99 ; 6893.7,3574.8 6972.44,3574.8 ; 6893.7,3586.61 6976.38,3586.61 ; 6893.7,3598.43 6984.25,3598.43 ; 6893.7,3610.24 6984.25,3610.24
  text "FILM:" at 4200.79,-559.06 h50
  text "EPARGNE COMPOSANT" at 4468.5,-559.06 h50
  text "ARTEMIS" at 5633.86,-562.99 h50
  text "03/03/22" at 5641.73,-673.23 h39.37
  text "DOSSIER:" at 4200.79,-681.1 h50
  text "ART_CARD Rev 5" at 4622.05,-681.1 h50
Solder Mask Bottom:
  circle w12.2: c-275.59,-275.59 r98.43
  circle w12.2: c6889.76,3622.05 r98.43
  circle w12.2: c-275.59,4015.75 r98.43
  lines w10: 4173.23,-590.55 6082.68,-590.55 ; 4704.72,-708.66 4704.72,-472.44 ; 4173.23,-708.66 4173.23,-472.44 6082.68,-472.44 6082.68,-708.66 4173.23,-708.66
  lines w12.2: -425.2,-275.59 -125.98,-275.59 ; -425.2,4015.75 -125.98,4015.75 ; -370.08,-263.78 -275.59,-263.78 ; -370.08,-251.97 -279.53,-251.97 ; -370.08,4027.56 -275.59,4027.56 ; -370.08,4039.37 -279.53,4039.37 ; -366.14,-240.16 -279.53,-240.16 ; -366.14,4051.18 -279.53,4051.18 ; -358.27,-228.35 -279.53,-228.35 ; -358.27,4062.99 -279.53,4062.99 ; -350.39,-216.54 -279.53,-216.54 ; -350.39,4074.8 -279.53,4074.8 ; -342.52,-204.72 -279.53,-204.72 ; -342.52,4086.61 -279.53,4086.61 ; -326.77,-192.91 -279.53,-192.91 ; -326.77,4098.43 -279.53,4098.43 ; -303.15,-185.04 -279.53,-185.04 ; -303.15,4106.3 -279.53,4106.3 ; -275.59,-425.2 -275.59,-125.98 ; -275.59,-362.2 -240.16,-362.2 ; -275.59,-342.52 -204.72,-342.52 ; -275.59,3866.14 -275.59,4165.35 ; -275.59,3929.13 -240.16,3929.13 ; -275.59,3948.82 -204.72,3948.82 ; -271.65,-354.33 -216.54,-354.33 ; -271.65,-330.71 -200.79,-330.71 ; -271.65,-318.9 -188.98,-318.9 ; -271.65,-307.09 -188.98,-307.09 ; -271.65,-295.28 -181.1,-295.28 ; -271.65,-283.46 -181.1,-283.46 ; -271.65,3937.01 -216.54,3937.01 ; -271.65,3960.63 -200.79,3960.63 ; -271.65,3972.44 -188.98,3972.44 ; -271.65,3984.25 -188.98,3984.25 ; -271.65,3996.06 -181.1,3996.06 ; -271.65,4007.87 -181.1,4007.87 ; 6740.16,3622.05 7039.37,3622.05 ; 6795.28,3633.86 6889.76,3633.86 ; 6795.28,3645.67 6885.83,3645.67 ; 6799.21,3657.48 6885.83,3657.48 ; 6807.09,3669.29 6885.83,3669.29 ; 6814.96,3681.1 6885.83,3681.1 ; 6822.83,3692.91 6885.83,3692.91 ; 6838.58,3704.72 6885.83,3704.72 ; 6862.2,3712.6 6885.83,3712.6 ; 6889.76,3472.44 6889.76,3771.65 ; 6889.76,3535.43 6925.2,3535.43 ; 6889.76,3555.12 6960.63,3555.12 ; 6893.7,3543.31 6948.82,3543.31 ; 6893.7,3566.93 6964.57,3566.93 ; 6893.7,3578.74 6976.38,3578.74 ; 6893.7,3590.55 6976.38,3590.55 ; 6893.7,3602.36 6984.25,3602.36 ; 6893.7,3614.17 6984.25,3614.17
  text "ARTEMIS" at 4586.61,-562.99 h50
  text "EPARGNE SOUDURE" at 5807.09,-562.99 h50
  text "FILM:" at 6043.31,-562.99 h50
  text "03/03/22" at 4566.93,-673.23 h39.37
  text "ART_CARD Rev 5" at 5629.92,-681.1 h50
  text "DOSSIER:" at 6043.31,-681.1 h50
Assembly Drawing Top:
  circle w1.97: c7290.04,-4202.09 r37.5
  circle w1.97: c7290.04,-4202.09 r70.31
  lines w1.97: -5118.15,1122.09 -4724.37,1122.09 ; -5118.11,-2814.92 -4921.26,-2814.92 ; -5118.11,-846.42 -4921.26,-846.42 ; -5118.11,1122.09 -4921.26,1122.09 ; -5118.11,3090.59 -4921.26,3090.59 ; -5118.11,5059.09 -4921.26,5059.09 ; -3149.61,-4527.52 -3149.61,-4330.67 ; -3149.61,6574.84 -3149.61,6771.69 ; -1181.1,-4527.52 -1181.1,-4330.67 ; -1181.1,6574.84 -1181.1,6771.69 ; 787.4,-4527.52 787.4,-4330.67 ; 787.4,6574.84 787.4,6771.69 ; 2755.91,-4527.56 2755.91,-4133.78 ; 2755.91,-4527.52 2755.91,-4330.67 ; 2755.91,6377.95 2755.91,6771.73 ; 2755.91,6574.84 2755.91,6771.69 ; 4579.37,-4307.03 4579.37,-2754.58 10411.12,-2754.58 ; 4579.37,-3940.03 5956.32,-3940.03 ; 4579.37,-3573.31 5960.83,-3573.31 ; 4579.37,-3303.31 5960.83,-3303.31 ; 4579.37,-2880.92 5956.32,-2880.92 ; 4724.41,-4527.52 4724.41,-4330.67 ; 4724.41,6574.84 4724.41,6771.69 ; 5956.32,-4307.03 5956.32,-2754.58 ; 5956.32,-3788.34 7652.4,-3788.34 10411.12,-3788.34 ; 5956.32,-3129.58 7652.4,-3129.58 10411.12,-3129.58 ; 5956.32,-2942.08 7652.4,-2942.08 10411.12,-2942.08 ; 6124.07,-4071.48 6155.51,-4076.57 ; 6215.53,-4027.34 6250.79,-4038.46 ; 6413.36,-3129.58 6413.36,-2754.58 ; 6631.31,-4307.03 6631.31,-3788.34 ; 6631.31,-4094.15 7652.4,-4094.15 10411.12,-4094.15 ; 6692.91,-4527.52 6692.91,-4330.67 ; 6692.91,6574.84 6692.91,6771.69 ; 7092.86,-3129.58 7092.86,-2754.58 ; 7186.77,-4202.09 7637.37,-4202.09 ; 7290.04,-4297.05 7290.04,-4107.12 ; 7652.4,-4307.03 7652.4,-2754.58 ; 8047.94,-4094.15 8047.94,-3788.34 ; 8475.53,-4307.03 8475.53,-4094.15 ; 8578.3,-2860.39 8578.3,-2896.66 8562.3,-2896.66 8562.3,-2815.06 8578.3,-2815.06 8578.3,-2825.17 ; 8613.77,-2827.69 8613.77,-2813.38 ; 8661.42,-4527.52 8661.42,-4330.67 ; 8661.42,6574.84 8661.42,6771.69 ; 8870.9,-2889.46 8870.9,-2896.82 8886.9,-2896.82 8886.9,-2813.73 8870.9,-2813.73 8870.9,-2822.39 ; 8949.66,-2845.38 8957.3,-2854.31 ; 8951.22,-2845.1 8959.43,-2853.44 ; 9447.45,-4307.03 9447.45,-4094.15 ; 9839.18,-4094.15 9839.18,-3788.34 ; 10236.18,1122.09 10629.96,1122.09 10433.07,1122.09 ; 10433.07,-2814.92 10629.92,-2814.92 ; 10433.07,-846.42 10629.92,-846.42 ; 10433.07,3090.59 10629.92,3090.59 ; 10433.07,5059.09 10629.92,5059.09 ; 4944.36,6481.47 5363.97,6481.47 ; 4944.36,6481.47 4944.36,6263.92 5363.97,6263.92 ; 4944.36,6481.47 4944.36,6574.84 5363.97,6574.84 ; 5363.97,6263.92 8380.36,6263.92 ; 5363.97,6263.92 5363.97,6481.47 ; 5363.97,6481.47 8380.36,6481.47 ; 5363.97,6481.47 5363.97,6574.84 ; 5363.97,6574.84 8380.36,6574.84 ; 6083.92,-3891.78 6083.92,-4159.77 6299.11,-4242.64 ; 6083.92,-3891.78 6299.11,-3834.31 6510.96,-3891.78 ; 6083.92,-3891.78 6299.11,-3959.95 ; 6299.11,-4242.64 6299.11,-3959.95 ; 6299.11,-4242.64 6510.96,-4159.77 6510.96,-3891.78 ; 6299.11,-3959.95 6510.96,-3891.78 ; 8380.36,6263.92 9041.68,6263.92 ; 8380.36,6263.92 8380.36,6481.47 ; 8380.36,6481.47 9041.68,6481.47 ; 8380.36,6481.47 8380.36,6574.84 ; 8380.36,6574.84 9041.68,6574.84 ; 9041.68,6263.92 10433.07,6263.92 10433.07,6481.47 ; 9041.68,6263.92 9041.68,6481.47 ; 9041.68,6481.47 10433.07,6481.47 ; 9041.68,6481.47 9041.68,6574.84 ; 9041.68,6574.84 10433.07,6574.84 ; 10433.07,6481.47 10433.07,6574.84 ; 10433.07,6574.84 -4921.26,6574.84 -4921.26,-4330.67 10433.07,-4330.67 10433.07,6574.84 ; -5118.11,-4527.52 -5118.11,6771.69 10629.92,6771.69 10629.92,-4527.52 -5118.11,-4527.52 ; 6332.73,-3986.93 6359.81,-4179.53 6388.66,-4169.43 6409.87,-4016.18 6431.26,-4154.51 6459.23,-4144.72 6485.62,-3933.4 6458.9,-3942.76 6444.85,-4079.75 6425.48,-3954.46 6394.49,-3965.31 6375.28,-4104.11 6359.76,-3977.47 6332.73,-3986.93 ; 7455.04,-4274.44 7583.9,-4239.59 7583.9,-4164.59 7455.04,-4131.78 7455.04,-4274.44 ; 8729.82,-2896.66 8745.77,-2896.66 8745.77,-2783.75 8729.82,-2783.75 8729.82,-2896.66 ; 8764.97,-2896.66 8780.92,-2896.66 8780.92,-2812.06 8764.97,-2812.06 8764.97,-2896.66 ; 8764.97,-2805.74 8764.97,-2783.75 8780.92,-2783.75 8780.92,-2805.74 8764.97,-2805.74
  text "8" at -4068.97,6617.81 h78.12
  text "7" at -2198.89,6617.81 h78.12
  text "6" at -228.61,6617.81 h78.12
  text "5" at 1736.34,6617.81 h78.12
  text "4" at 3704.85,6617.81 h78.12
  text "3" at 5675.13,6617.81 h78.12
  text "2" at 7643.63,6617.81 h78.12
  text "1" at 9529.69,6617.81 h78.12
  text "Rev" at 5053.55,6486.24 h41.67
  text "DESCRIPTION" at 6523.32,6486.24 h41.67
  text "DATE" at 8575.06,6486.24 h41.67
  text "APPROVED" at 9438.3,6486.24 h41.67
  text "1" at 5123.38,6330.78 h41.67
  text "F" at -5051.53,5761.51 h78.12
  text "F" at 10499.65,5761.51 h78.12
  text "E" at -5049.56,4019.39 h78.12
  text "E" at 10501.62,4019.39 h78.12
  text "D" at -5053.51,2050.88 h78.12
  text "D" at 10497.67,2050.88 h78.12
  text "C" at -5055.05,82.38 h78.12
  text "C" at 10496.13,82.38 h78.12
  text "B" at -5052.8,-1886.13 h78.12
  text "B" at 10498.38,-1886.13 h78.12
  text "UNLESS OTHERWISE SPECIFIED:" at 4604.38,-2860.02 h35
  text "NAME" at 6624.29,-2891.99 h32.5
  text "DATE" at 7277.43,-2891.99 h32.5
  text "OROLIA FRANCE" at 9102.9,-2892.87 h31.25
  text "DRAWN" at 6005.47,-3079.24 h32.5
  text "H ECHELARD" at 6562.29,-3079.73 h37.5
  text "03/03/2022" at 7195.79,-3079.98 h37.5
  text "PART NUMBER: ART_CARD_PCB" at 7755.91,-3090.55 h50
  text "THE INFORMATION CONTAINED IN THIS" at 6386.21,-3245.79 h27.5
  text "TITLE:" at 7679.94,-3298.48 h50
  text "DOCUMENT IS THE SOLE PROPERTY OF OROLIA." at 6266.85,-3340.16 h27.5
  text "ART_CARD" at 8706.01,-3423.74 h62.5
  text "ANY REPRODUCTION, DISCLOSURE OR" at 6394.42,-3434.53 h27.5
  text "MANUFATURE OF THIS INFORMATION IN PART OR" at 6252.86,-3528.9 h27.5
  text "AS A WHOLE WITHOUT THE WRITTEN PERMISSION" at 6255.18,-3623.27 h27.5
  text "A" at -5061.51,-3628.25 h78.12
  text "A" at 10489.67,-3628.25 h78.12
  text "MATERIAL" at 4599.31,-3660.78 h30
  text "OF OROLIA GROUP IS PROHIBITED." at 6430.67,-3717.64 h27.5
  text "PCB" at 5227.72,-3770.48 h31.25
  text "SIZE" at 7665.37,-3915.21 h50
  text "DWG.  NO." at 8059.02,-3915.21 h50
  text "REV" at 9901.57,-3917.32 h50
  text "CHANGE RESTRICTED" at 6874.62,-3925.74 h31.25
  text "ART_CARD_PCB" at 8698.82,-4007.87 h62.5
  text "FINISH" at 4600.98,-4033.06 h30
  text "NO MANUAL CHANGES" at 6853.01,-4048.45 h31.25
  text "A3" at 7785.39,-4053.65 h62.5
  text "5" at 10100.69,-4053.65 h62.5
  text "THIRD ANGLE" at 6686.15,-4179.27 h30
  text "SCALE: 1:1" at 7739.8,-4254.49 h50
  text "SHEET 1 OF 1" at 9538.32,-4254.17 h50
  text "DO NOT SCALE" at 8483.56,-4257.91 h50
  text "PROJECTION" at 6686.15,-4278.64 h30
  text "8" at -4068.97,-4484.55 h78.12
  text "7" at -2198.89,-4484.55 h78.12
  text "6" at -228.61,-4484.55 h78.12
  text "5" at 1736.34,-4484.55 h78.12
  text "4" at 3704.85,-4484.55 h78.12
  text "3" at 5675.13,-4484.55 h78.12
  text "2" at 7643.63,-4484.55 h78.12
  text "1" at 9529.69,-4484.55 h78.12
Assembly Drawing Bottom:
  circle w1.97: c-1778.22,-4202.09 r37.5
  circle w1.97: c-1778.22,-4202.09 r70.31
  lines w1.97: -5118.15,1122.09 -4724.37,1122.09 ; -5118.11,-2814.92 -4921.26,-2814.92 ; -5118.11,-846.42 -4921.26,-846.42 ; -5118.11,1122.09 -4921.26,1122.09 ; -5118.11,3090.59 -4921.26,3090.59 ; -5118.11,5059.09 -4921.26,5059.09 ; -4899.31,-4094.15 -2140.59,-4094.15 -1119.5,-4094.15 ; -4899.31,-3788.34 -2140.59,-3788.34 -444.51,-3788.34 ; -4899.31,-3129.58 -2140.59,-3129.58 -444.51,-3129.58 ; -4899.31,-2942.08 -2140.59,-2942.08 -444.51,-2942.08 ; -4899.31,-2754.58 932.44,-2754.58 932.44,-4307.03 ; -4327.37,-4094.15 -4327.37,-3788.34 ; -3935.63,-4307.03 -3935.63,-4094.15 ; -3447.62,-2853.44 -3439.41,-2845.1 ; -3445.48,-2854.31 -3437.85,-2845.38 ; -3359.09,-2889.46 -3359.09,-2896.82 -3375.09,-2896.82 -3375.09,-2813.73 -3359.09,-2813.73 -3359.09,-2822.39 ; -3149.61,-4527.52 -3149.61,-4330.67 ; -3149.61,6574.84 -3149.61,6771.69 ; -3101.96,-2827.69 -3101.96,-2813.38 ; -3066.49,-2860.39 -3066.49,-2896.66 -3050.49,-2896.66 -3050.49,-2815.06 -3066.49,-2815.06 -3066.49,-2825.17 ; -2963.72,-4307.03 -2963.72,-4094.15 ; -2536.13,-4094.15 -2536.13,-3788.34 ; -2140.59,-4307.03 -2140.59,-2754.58 ; -2125.56,-4202.09 -1674.96,-4202.09 ; -1778.22,-4297.05 -1778.22,-4107.12 ; -1581.05,-3129.58 -1581.05,-2754.58 ; -1181.1,-4527.52 -1181.1,-4330.67 ; -1181.1,6574.84 -1181.1,6771.69 ; -1119.5,-4307.03 -1119.5,-3788.34 ; -901.55,-3129.58 -901.55,-2754.58 ; -738.97,-4038.46 -703.72,-4027.34 ; -643.7,-4076.57 -612.26,-4071.48 ; -449.01,-3573.31 932.44,-3573.31 ; -449.01,-3303.31 932.44,-3303.31 ; -444.51,-4307.03 -444.51,-2754.58 ; -444.51,-3940.03 932.44,-3940.03 ; -444.51,-2880.92 932.44,-2880.92 ; 787.4,-4527.52 787.4,-4330.67 ; 787.4,6574.84 787.4,6771.69 ; 2755.91,-4527.56 2755.91,-4133.78 ; 2755.91,-4527.52 2755.91,-4330.67 ; 2755.91,6377.95 2755.91,6771.73 ; 2755.91,6574.84 2755.91,6771.69 ; 4724.41,-4527.52 4724.41,-4330.67 ; 4724.41,6574.84 4724.41,6771.69 ; 6692.91,-4527.52 6692.91,-4330.67 ; 6692.91,6574.84 6692.91,6771.69 ; 8661.42,-4527.52 8661.42,-4330.67 ; 8661.42,6574.84 8661.42,6771.69 ; 10236.18,1122.09 10629.96,1122.09 10433.07,1122.09 ; 10433.07,-2814.92 10629.92,-2814.92 ; 10433.07,-846.42 10629.92,-846.42 ; 10433.07,3090.59 10629.92,3090.59 ; 10433.07,5059.09 10629.92,5059.09 ; -4921.26,6481.47 -3529.87,6481.47 ; -4921.26,6481.47 -4921.26,6263.92 -3529.87,6263.92 ; -4921.26,6481.47 -4921.26,6574.84 ; -4921.26,6574.84 -3529.87,6574.84 ; -4921.26,6574.84 10433.07,6574.84 10433.07,-4330.67 -4921.26,-4330.67 -4921.26,6574.84 ; -3529.87,6263.92 -2868.55,6263.92 ; -3529.87,6263.92 -3529.87,6481.47 ; -3529.87,6481.47 -2868.55,6481.47 ; -3529.87,6481.47 -3529.87,6574.84 ; -3529.87,6574.84 -2868.55,6574.84 ; -2868.55,6263.92 147.85,6263.92 ; -2868.55,6263.92 -2868.55,6481.47 ; -2868.55,6481.47 147.85,6481.47 ; -2868.55,6481.47 -2868.55,6574.84 ; -2868.55,6574.84 147.85,6574.84 ; -999.15,-3891.78 -999.15,-4159.77 -787.3,-4242.64 ; -999.15,-3891.78 -787.3,-3834.31 -572.11,-3891.78 ; -999.15,-3891.78 -787.3,-3959.95 ; -787.3,-4242.64 -787.3,-3959.95 ; -787.3,-4242.64 -572.11,-4159.77 -572.11,-3891.78 ; -787.3,-3959.95 -572.11,-3891.78 ; 147.85,6263.92 567.45,6263.92 567.45,6481.47 ; 147.85,6263.92 147.85,6481.47 ; 147.85,6481.47 567.45,6481.47 ; 147.85,6481.47 147.85,6574.84 ; 147.85,6574.84 567.45,6574.84 567.45,6481.47 ; -5118.11,-4527.52 -5118.11,6771.69 10629.92,6771.69 10629.92,-4527.52 -5118.11,-4527.52 ; -3269.11,-2896.66 -3253.15,-2896.66 -3253.15,-2812.06 -3269.11,-2812.06 -3269.11,-2896.66 ; -3269.11,-2805.74 -3269.11,-2783.75 -3253.15,-2783.75 -3253.15,-2805.74 -3269.11,-2805.74 ; -3233.96,-2896.66 -3218,-2896.66 -3218,-2783.75 -3233.96,-2783.75 -3233.96,-2896.66 ; -2072.08,-4239.59 -1943.22,-4274.44 -1943.22,-4131.78 -2072.08,-4164.59 -2072.08,-4239.59 ; -973.81,-3933.4 -947.09,-3942.76 -933.04,-4079.75 -913.67,-3954.46 -882.68,-3965.31 -863.47,-4104.11 -847.95,-3977.47 -820.92,-3986.93 -848,-4179.53 -876.85,-4169.43 -898.06,-4016.18 -919.45,-4154.51 -947.42,-4144.72 -973.81,-3933.4
  text "1" at -4017.88,6617.81 h78.12
  text "2" at -2131.82,6617.81 h78.12
  text "3" at -163.32,6617.81 h78.12
  text "4" at 1806.96,6617.81 h78.12
  text "5" at 3775.47,6617.81 h78.12
  text "6" at 5740.42,6617.81 h78.12
  text "7" at 7710.7,6617.81 h78.12
  text "8" at 9580.78,6617.81 h78.12
  text "APPROVED" at -3926.49,6486.24 h41.67
  text "DATE" at -3063.25,6486.24 h41.67
  text "DESCRIPTION" at -1011.51,6486.24 h41.67
  text "Rev" at 458.26,6486.24 h41.67
  text "1" at 388.43,6330.78 h41.67
  text "F" at -4987.84,5761.51 h78.12
  text "F" at 10563.34,5761.51 h78.12
  text "E" at -4989.81,4019.39 h78.12
  text "E" at 10561.37,4019.39 h78.12
  text "D" at -4985.86,2050.88 h78.12
  text "D" at 10565.32,2050.88 h78.12
  text "C" at -4984.32,82.38 h78.12
  text "C" at 10566.86,82.38 h78.12
  text "B" at -4986.57,-1886.13 h78.12
  text "B" at 10564.61,-1886.13 h78.12
  text "UNLESS OTHERWISE SPECIFIED:" at 907.43,-2860.02 h35
  text "OROLIA FRANCE" at -3591.09,-2892.87 h31.25
  text "DATE" at -1765.62,-2891.99 h32.5
  text "NAME" at -1112.47,-2891.99 h32.5
  text "H ECHELARD" at -1050.48,-3079.73 h37.5
  text "DRAWN" at -493.66,-3079.24 h32.5
  text "03/03/2022" at -1683.98,-3079.98 h37.5
  text "PART NUMBER: ART_CARD_PCB" at -2154.31,-3104.25 h50
  text "THE INFORMATION CONTAINED IN THIS" at -874.4,-3245.79 h27.5
  text "TITLE:" at -2168.13,-3298.48 h50
  text "DOCUMENT IS THE SOLE PROPERTY OF OROLIA." at -755.04,-3340.16 h27.5
  text "ART_CARD" at -3194.2,-3423.74 h62.5
  text "ANY REPRODUCTION, DISCLOSURE OR" at -882.61,-3434.53 h27.5
  text "MANUFATURE OF THIS INFORMATION IN PART OR" at -741.05,-3528.9 h27.5
  text "AS A WHOLE WITHOUT THE WRITTEN PERMISSION" at -743.37,-3623.27 h27.5
  text "A" at -4977.86,-3628.25 h78.12
  text "A" at 10573.32,-3628.25 h78.12
  text "MATERIAL" at 912.5,-3660.78 h30
  text "OF OROLIA GROUP IS PROHIBITED." at -918.86,-3717.64 h27.5
  text "PCB" at 284.09,-3770.48 h31.25
  text "DWG.  NO." at -2547.21,-3915.21 h50
  text "SIZE" at -2153.56,-3915.21 h50
  text "REV" at -4389.76,-3917.32 h50
  text "CHANGE RESTRICTED" at -1362.81,-3925.74 h31.25
  text "ART_CARD_PCB" at -3061.02,-4024.61 h62.5
  text "FINISH" at 910.83,-4033.06 h30
  text "NO MANUAL CHANGES" at -1341.2,-4048.45 h31.25
  text "5" at -4588.88,-4053.65 h62.5
  text "A3" at -2273.58,-4053.65 h62.5
  text "THIRD ANGLE" at -1174.34,-4179.27 h30
  text "SHEET 1 OF 1" at -4026.51,-4254.17 h50
  text "SCALE: 1:1" at -2227.99,-4254.49 h50
  text "DO NOT SCALE" at -2971.75,-4257.91 h50
  text "PROJECTION" at -1174.34,-4278.64 h30
  text "1" at -4017.88,-4484.55 h78.12
  text "2" at -2131.82,-4484.55 h78.12
  text "3" at -163.32,-4484.55 h78.12
  text "4" at 1806.96,-4484.55 h78.12
  text "5" at 3775.47,-4484.55 h78.12
  text "6" at 5740.42,-4484.55 h78.12
  text "7" at 7710.7,-4484.55 h78.12
  text "8" at 9580.78,-4484.55 h78.12
Layer_9:
  drawing of 460 lines, arcs and shapes, not listed
  text "J4-Pin 1" at 37.58,4087.28 h68.9
  text "J4" at 934.11,4087.28 h68.9
  text "J4-Pin2" at 1897.25,4087.28 h68.9
  text "J5" at -1235.8,3352.28 h68.9
  text "J3-Pin1" at -1686.92,3015.43 h68.9
  text "J6" at -1235.8,2749.38 h68.9
  text "J7" at -1235.8,2174.25 h68.9
  text "J8" at -1235.8,1600.42 h68.9
  text "J9" at -1235.8,951.99 h68.9
  text "J1-Pin1" at 1273.07,-664.16 h68.9
Layer_10:
  drawing of 248 lines, arcs and shapes, not listed